# Altium PCB MK1.PcbDoc
Units mm, origin at the board's own origin, x right, y up, seen from the top; angles counter-clockwise.
Board outline 100 x 80 mm, 4 copper layers (Top signal, GND, VCC, Bottom signal), stack 0.603 mm thick; 68 components, 43 nets, 503 pads, 0 vias.
Unrouted connection lines stored in the file: 242.
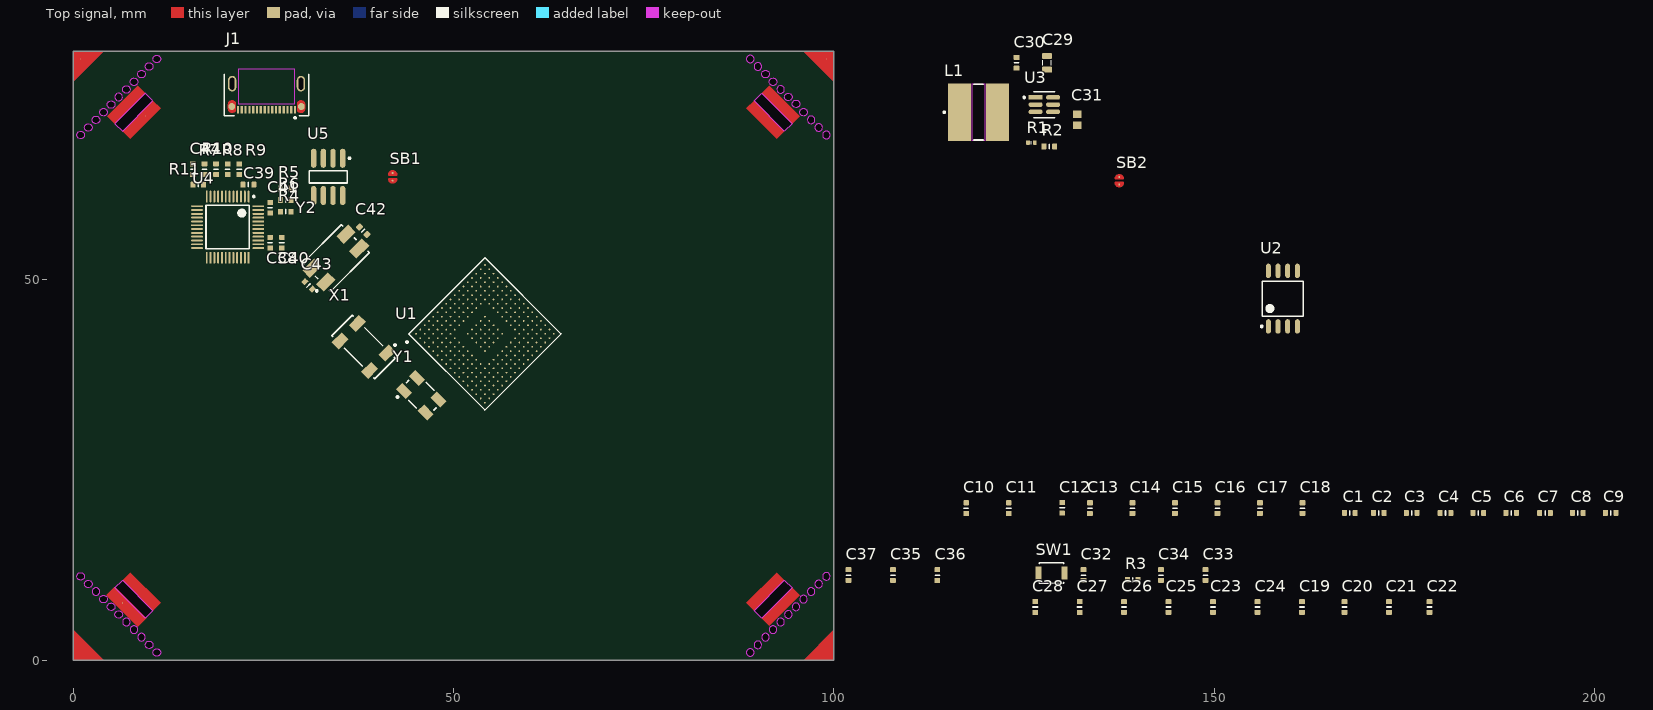
[diagram p0: Top signal view]
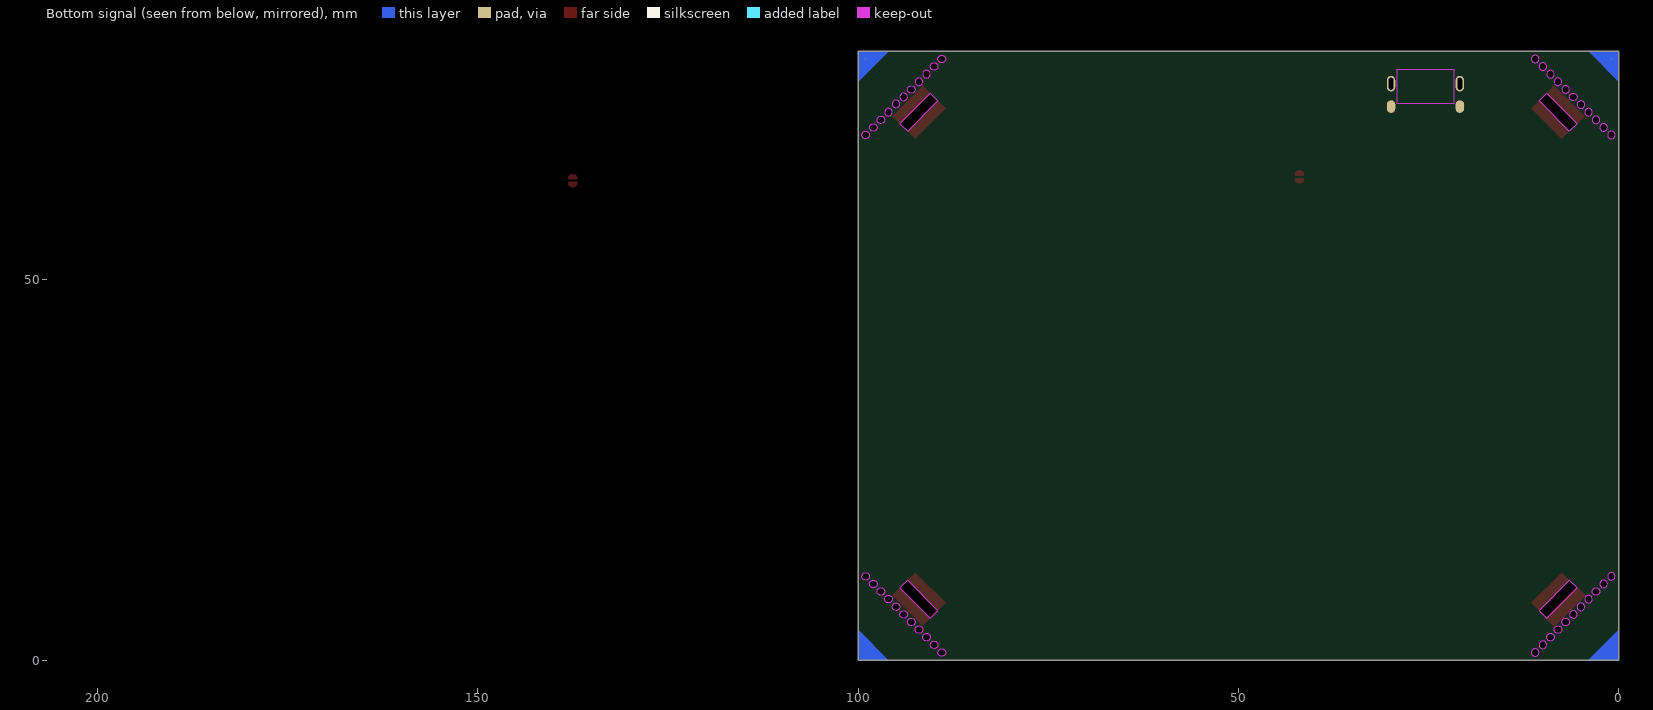
[diagram p1: Bottom signal view, seen from below]
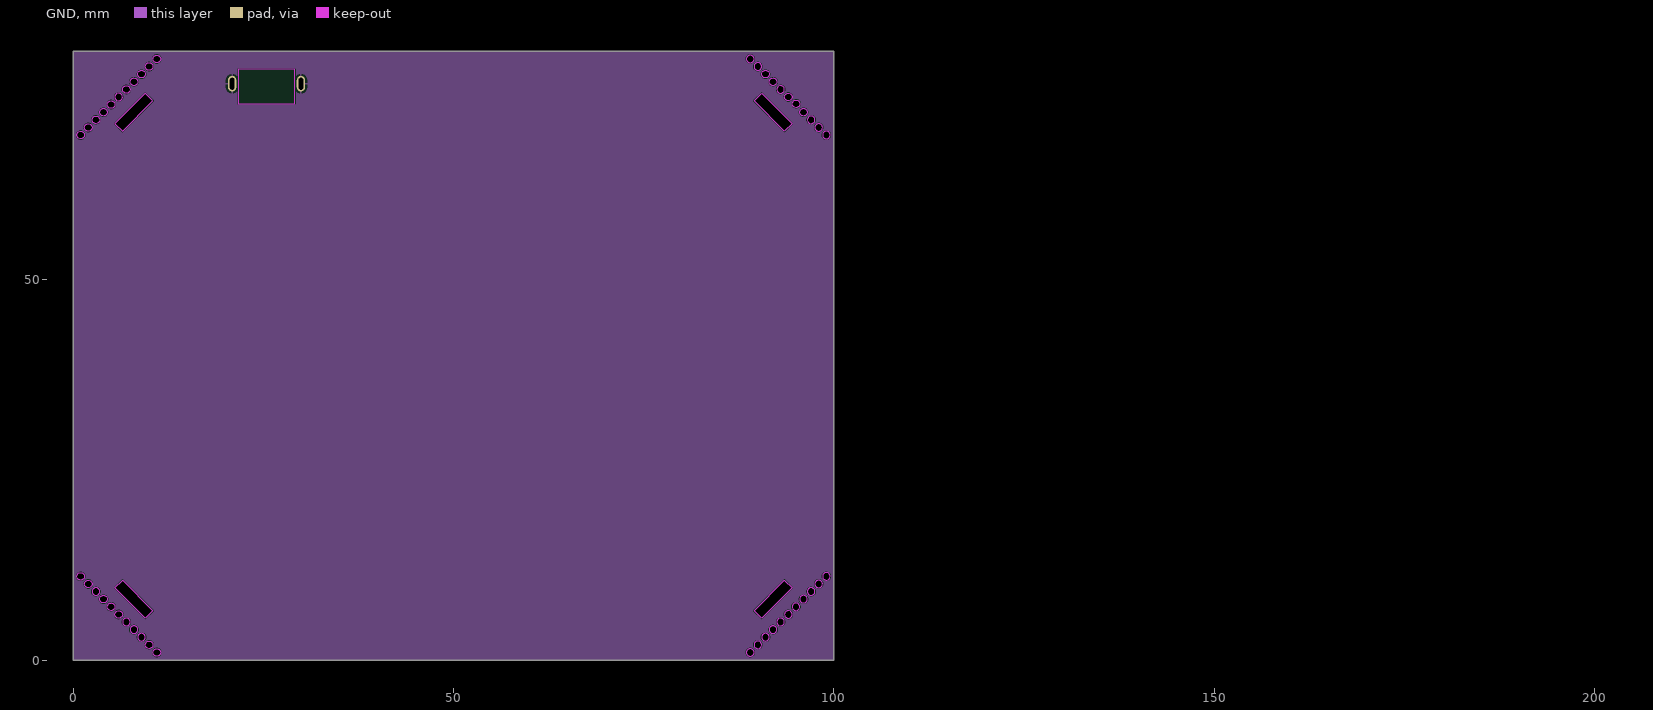
[diagram p2: GND]
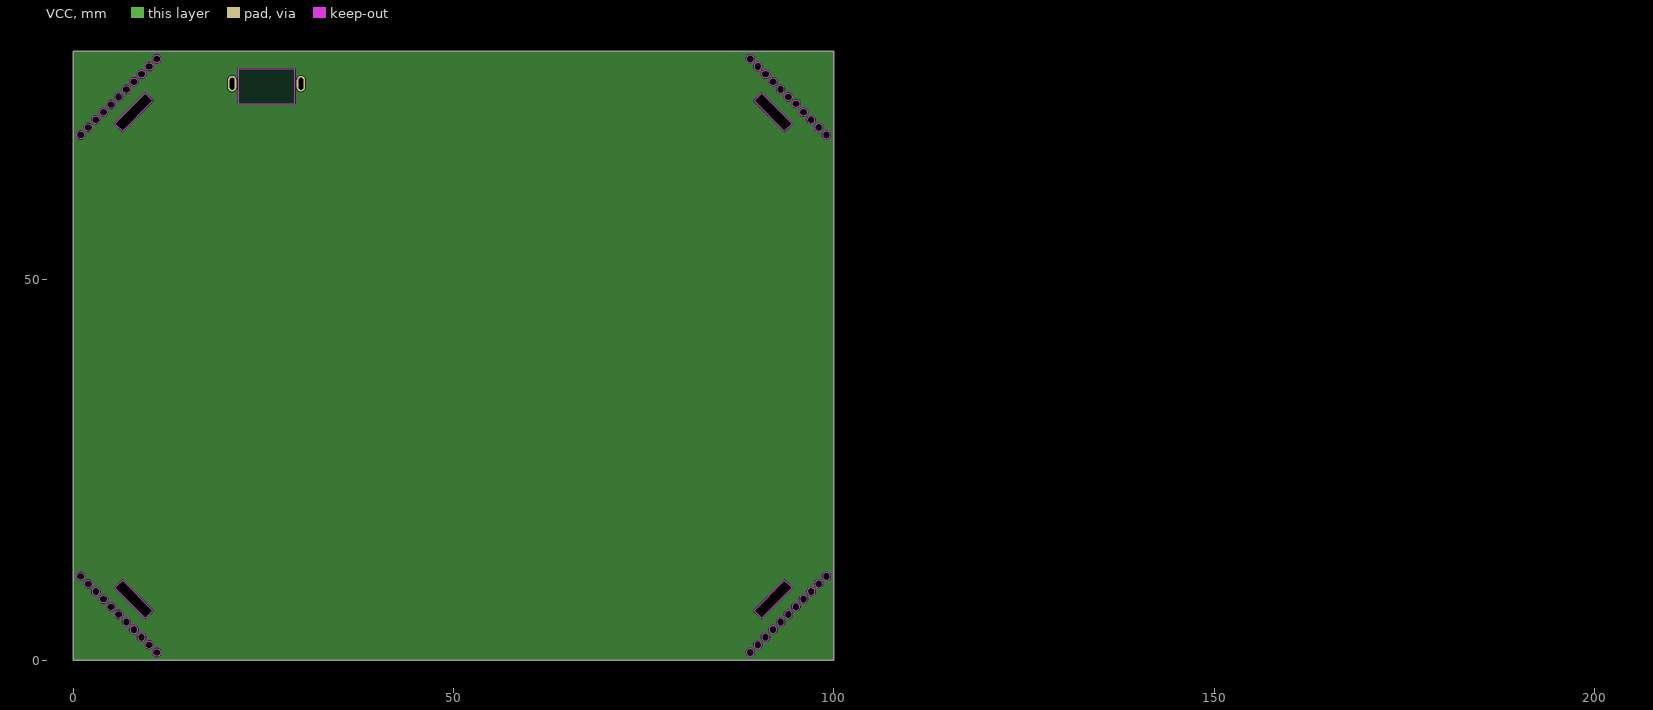
[diagram p3: VCC]

## Layer stack, top to bottom
Top Solder: solder mask 0.0102, Solder Resist, Dk 3.5
Top signal: signal copper 0.0356
Dielectric 2: prepreg 0.0711, PP-006, Dk 4.1
GND: signal copper 0.035
Dielectric 1: dielectric 0.32, FR-4, Dk 4.8
VCC: signal copper 0.035
Dielectric 3: prepreg 0.0711, PP-006, Dk 4.1
Bottom signal: signal copper 0.0356
Bottom Solder: solder mask 0.0102, Solder Resist, Dk 3.5

## Board outline
0,0 0,80 100,80 100,0
cut-out: 95.5,72 cw(c96,72) 96,72.5 cw(c96,72) 96.5,72 cw(c96,72) 96,71.5 cw(c96,72)
cut-out: 96.5,71 ccw(c97,71) 97,70.5 ccw(c97,71) 97.5,71 ccw(c97,71) 97,71.5 ccw(c97,71)
cut-out: 97.5,70 ccw(c98,70) 98,69.5 ccw(c98,70) 98.5,70 ccw(c98,70) 98,70.5 ccw(c98,70)
cut-out: 91.5,76 cw(c92,76) 92,76.5 cw(c92,76) 92.5,76 cw(c92,76) 92,75.5 cw(c92,76)
cut-out: 94.527,73.102 cw(c95.027,73.102) 95.027,73.602 cw(c95.027,73.102) 95.527,73.102 cw(c95.027,73.102) 95.027,72.602 cw(c95.027,73.102)
cut-out: 92.5,75 ccw(c93,75) 93,74.5 ccw(c93,75) 93.5,75 ccw(c93,75) 93,75.5 ccw(c93,75)
cut-out: 93.5,74 cw(c94,74) 94,74.5 cw(c94,74) 94.5,74 cw(c94,74) 94,73.5 cw(c94,74)
cut-out: 99,68.5 ccw(c99,69) 99.5,69 ccw(c99,69) 99,69.5 ccw(c99,69) 98.5,69 ccw(c99,69)
cut-out: 98.5,11 ccw(c99,11) 99,10.5 ccw(c99,11) 99.5,11 ccw(c99,11) 99,11.5 ccw(c99,11)
cut-out: 97.5,10 ccw(c98,10) 98,9.5 ccw(c98,10) 98.5,10 ccw(c98,10) 98,10.5 ccw(c98,10)
cut-out: 96.5,9 ccw(c97,9) 97,8.5 ccw(c97,9) 97.5,9 ccw(c97,9) 97,9.5 ccw(c97,9)
cut-out: 95.5,8 ccw(c96,8) 96,7.5 ccw(c96,8) 96.5,8 ccw(c96,8) 96,8.5 ccw(c96,8)
cut-out: 94.5,7 ccw(c95,7) 95,6.5 ccw(c95,7) 95.5,7 ccw(c95,7) 95,7.5 ccw(c95,7)
cut-out: 93.5,6 ccw(c94,6) 94,5.5 ccw(c94,6) 94.5,6 ccw(c94,6) 94,6.5 ccw(c94,6)
cut-out: 92.5,5 ccw(c93,5) 93,4.5 ccw(c93,5) 93.5,5 ccw(c93,5) 93,5.5 ccw(c93,5)
cut-out: 91.5,4 ccw(c92,4) 92,3.5 ccw(c92,4) 92.5,4 ccw(c92,4) 92,4.5 ccw(c92,4)
cut-out: 88.5,79 ccw(c89,79) 89,78.5 ccw(c89,79) 89.5,79 ccw(c89,79) 89,79.5 ccw(c89,79)
cut-out: 11,78.5 cw(c11,79) 10.5,79 cw(c11,79) 11,79.5 cw(c11,79) 11.5,79 cw(c11,79)
cut-out: 90.5,77 cw(c91,77) 91,77.5 cw(c91,77) 91.5,77 cw(c91,77) 91,76.5 cw(c91,77)
cut-out: 89.5,78 ccw(c90,78) 90,77.5 ccw(c90,78) 90.5,78 ccw(c90,78) 90,78.5 ccw(c90,78)
cut-out: 9.5,78 cw(c10,78) 10,78.5 cw(c10,78) 10.5,78 cw(c10,78) 10,77.5 cw(c10,78)
cut-out: 9,76.5 cw(c9,77) 8.5,77 cw(c9,77) 9,77.5 cw(c9,77) 9.5,77 cw(c9,77)
cut-out: 8,75.5 cw(c8,76) 7.5,76 cw(c8,76) 8,76.5 cw(c8,76) 8.5,76 cw(c8,76)
cut-out: 7,74.5 cw(c7,75) 6.5,75 cw(c7,75) 7,75.5 cw(c7,75) 7.5,75 cw(c7,75)
cut-out: 6,73.5 ccw(c6,74) 6.5,74 ccw(c6,74) 6,74.5 ccw(c6,74) 5.5,74 ccw(c6,74)
cut-out: 90.5,3 ccw(c91,3) 91,2.5 ccw(c91,3) 91.5,3 ccw(c91,3) 91,3.5 ccw(c91,3)
cut-out: 5,72.5 cw(c5,73) 4.5,73 cw(c5,73) 5,73.5 cw(c5,73) 5.5,73 cw(c5,73)
cut-out: 89.5,2 ccw(c90,2) 90,1.5 ccw(c90,2) 90.5,2 ccw(c90,2) 90,2.5 ccw(c90,2)
cut-out: 88.5,1 ccw(c89,1) 89,0.5 ccw(c89,1) 89.5,1 ccw(c89,1) 89,1.5 ccw(c89,1)
cut-out: 4,71.5 cw(c4,72) 3.5,72 cw(c4,72) 4,72.5 cw(c4,72) 4.5,72 cw(c4,72)
cut-out: 3,70.5 cw(c3,71) 2.5,71 cw(c3,71) 3,71.5 cw(c3,71) 3.5,71 cw(c3,71)
cut-out: 2,69.5 cw(c2,70) 1.5,70 cw(c2,70) 2,70.5 cw(c2,70) 2.5,70 cw(c2,70)
cut-out: 1,68.5 cw(c1,69) 0.5,69 cw(c1,69) 1,69.5 cw(c1,69) 1.5,69 cw(c1,69)
cut-out: 7.5,4 ccw(c8,4) 8,3.5 ccw(c8,4) 8.5,4 ccw(c8,4) 8,4.5 ccw(c8,4)
cut-out: 6.5,5 ccw(c7,5) 7,4.5 ccw(c7,5) 7.5,5 ccw(c7,5) 7,5.5 ccw(c7,5)
cut-out: 10.5,1 cw(c11,1) 11,1.5 cw(c11,1) 11.5,1 cw(c11,1) 11,0.5 cw(c11,1)
cut-out: 8.5,3 ccw(c9,3) 9,2.5 ccw(c9,3) 9.5,3 ccw(c9,3) 9,3.5 ccw(c9,3)
cut-out: 9.5,2 cw(c10,2) 10,2.5 cw(c10,2) 10.5,2 cw(c10,2) 10,1.5 cw(c10,2)
cut-out: 2,9.5 cw(c2,10) 1.5,10 cw(c2,10) 2,10.5 cw(c2,10) 2.5,10 cw(c2,10)
cut-out: 1,10.5 cw(c1,11) 0.5,11 cw(c1,11) 1,11.5 cw(c1,11) 1.5,11 cw(c1,11)
cut-out: 6,5.5 cw(c6,6) 5.5,6 cw(c6,6) 6,6.5 cw(c6,6) 6.5,6 cw(c6,6)
cut-out: 5,6.5 cw(c5,7) 4.5,7 cw(c5,7) 5,7.5 cw(c5,7) 5.5,7 cw(c5,7)
cut-out: 3,8.5 ccw(c3,9) 3.5,9 ccw(c3,9) 3,9.5 ccw(c3,9) 2.5,9 ccw(c3,9)
cut-out: 4,7.5 cw(c4,8) 3.5,8 cw(c4,8) 4,8.5 cw(c4,8) 4.5,8 cw(c4,8)
cut-out: 93.5,10.5 94.5,9.5 90.5,5.5 89.5,6.5
cut-out: 89.5,73.5 90.5,74.5 94.5,70.5 93.5,69.5
cut-out: 5.5,70.5 6.5,69.5 10.5,73.5 9.5,74.5
cut-out: 6.5,10.5 10.5,6.5 9.5,5.5 5.5,9.5

## Design rules (kind name [scope] priority, off if disabled: settings)
Clearance [All] p1: gap=0.1 ignorepadtopadclearanceinfootprint=FALSE except(0.15: SMDPad-SMDPad; 0.2: Arc-Via Arc-Hole Track-Via Track-Hole SMDPad-Via THPad-Via Via-Via)
PolygonConnect [All] p1: connectstyle=Relief reliefconductorwidth=0.254 reliefentries=4 polygonreliefangle="90 Angle" airgapwidth=0.254
RoutingVias [All] p1: holewidth=0.508 width=1.27 viastyle="Through Hole" minholewidth=0.15 minwidth=0.25 maxholewidth=0.254 maxwidth=0.8
SolderMaskExpansion [All] p1: expansion=0.102 istentingtop=FALSE
SupplyNets "Schematic Supply Nets_3" [InNet('3V3')] p1: voltage=0.000
SupplyNets "Schematic Supply Nets_1" [InNet('+5')] p2: voltage=0.000
SupplyNets "Schematic Supply Nets" [InNet('GND')] p3: voltage=0.000
Width [All] p1: maxlimit=0.508 minlimit=0.1 preferedwidth=0.254 minimp=50.000000 maximp=50.000000 favimp=50.000000
30 further rules are at their usual default settings.

## Classes and differential pairs
component class "USB interface": J1
component class SMPS: C29 C30 C31 L1 R1 R2 U3
component class MCU: C1 C2 C3 C4 C5 C6 C7 C8 C9 C10 C11 C12 C13 C14 C15 C16 C17 C18 C19 C20 C21 C22 C23 C24 C25 C26 C27 C28 C32 C33 C34 C35 C36 C37 R3 SW1 U1 U2 X1 Y1
component class Main: SB1 SB2
component class FTDI: C38 C39 C40 C41 C42 C43 C44 R4 R5 R6 R7 R8 R9 R10 R11 U4 U5 Y2

## Components (designator, comment, footprint, x,y, rotation, side; value= is the part's Value field where it differs from the comment)
C1 "Capacitor 470nF +/-20% 25V 0603" CAPC0603(1608)100_L 167.801,19.339 r0 top value=100nF
C2 "Capacitor 470nF +/-20% 25V 0603" CAPC0603(1608)100_L 171.611,19.339 r0 top value=100nF
C3 "Capacitor 470nF +/-20% 25V 0603" CAPC0603(1608)100_L 175.929,19.339 r0 top value=100nF
C4 "Capacitor 470nF +/-20% 25V 0603" CAPC0603(1608)100_L 180.374,19.339 r0 top value=100nF
C5 "Capacitor 470nF +/-20% 25V 0603" CAPC0603(1608)100_L 184.692,19.339 r0 top value=100nF
C6 "Capacitor 470nF +/-20% 25V 0603" CAPC0603(1608)100_L 189.01,19.339 r0 top value=100nF
C7 "Capacitor 470nF +/-20% 25V 0603" CAPC0603(1608)100_L 193.455,19.339 r0 top value=100nF
C8 "Capacitor 470nF +/-20% 25V 0603" CAPC0603(1608)100_L 197.773,19.339 r0 top value=100nF
C9 "Capacitor 470nF +/-20% 25V 0603" CAPC0603(1608)100_L 202.091,19.339 r0 top value=100nF
C10 "Capacitor 470nF +/-20% 25V 0603" CAPC0603(1608)100_L 117.382,19.974 r90 top value=100nF
C11 "Capacitor 470nF +/-20% 25V 0603" CAPC0603(1608)100_L 122.97,19.974 r90 top value=100nF
C12 "Capacitor 470nF +/-20% 25V 0603" CAPC0603(1608)100_L 130,20 r90 top value=100nF
C13 "Capacitor 470nF +/-20% 25V 0603" CAPC0603(1608)100_L 133.638,19.974 r90 top value=100nF
C14 "Capacitor 470nF +/-20% 25V 0603" CAPC0603(1608)100_L 139.226,19.974 r90 top value=100nF
C15 "Capacitor 470nF +/-20% 25V 0603" CAPC0603(1608)100_L 144.814,19.974 r90 top value=100nF
C16 "Capacitor 470nF +/-20% 25V 0603" CAPC0603(1608)100_L 150.402,19.974 r90 top value=100nF
C17 "Capacitor 470nF +/-20% 25V 0603" CAPC0603(1608)100_L 155.99,19.974 r90 top value=100nF
C18 "Capacitor 470nF +/-20% 25V 0603" CAPC0603(1608)100_L 161.578,19.974 r90 top value=100nF
C19 "Capacitor 470nF +/-20% 25V 0603" CAPC0603(1608)100_L 161.504,6.974 r90 top value=100nF
C20 "Capacitor 470nF +/-20% 25V 0603" CAPC0603(1608)100_L 167.092,6.974 r90 top value=100nF
C21 "Capacitor 470nF +/-20% 25V 0603" CAPC0603(1608)100_L 172.934,6.974 r90 top value=100nF
C22 "Capacitor 4.7µF +/-20% 10V 0603" CAPC0603(1608)100_L 178.268,6.974 r90 top value=4.7µF
C23 "Capacitor 470nF +/-20% 25V 0603" CAPC0603(1608)100_L 149.82,6.974 r90 top value=100nF
C24 "Capacitor 1µF +/-40% 50V 0603" CAPC0603(1608)100_L 155.662,6.974 r90 top value=1µF
C25 "Capacitor 4.7µF +/-20% 10V 0603" CAPC0603(1608)100_L 143.978,6.974 r90 top value=4.7µF
C26 "Capacitor 470nF +/-20% 25V 0603" CAPC0603(1608)100_L 138.136,6.974 r90 top value=2.2uF
C27 "Capacitor 470nF +/-20% 25V 0603" CAPC0603(1608)100_L 132.294,6.974 r90 top value=2.2uF
C28 "Capacitor 470nF +/-20% 25V 0603" CAPC0603(1608)100_L 126.452,6.974 r90 top value=2.2uF
C29 "Capacitor 4.7µF +/-40% 25V 0805" CAPC0805(2012)145_L 128,78.5 r90 top value=100nF
C30 "Capacitor 4.7µF +/-20% 10V 0603" CAPC0603(1608)100_L 124,78.5 r90 top value=2.2uF
C31 "Capacitor 1uF +/- 10% 16V 0603" CAPC1608X90X35ML15T15 132,71 r90 top value=47uF
C32 "Capacitor 470nF +/-20% 25V 0603" CAPC0603(1608)100_L 132.791,11.176 r90 top value=100nF
C33 "Capacitor 470nF +/-20% 25V 0603" CAPC0603(1608)100_L 148.844,11.176 r90 top value=10pF
C34 "Capacitor 470nF +/-20% 25V 0603" CAPC0603(1608)100_L 142.977,11.176 r90 top value=10pF
C35 "Capacitor 470nF +/-20% 25V 0603" CAPC0603(1608)100_L 107.747,11.176 r90 top value=20pF
C36 "Capacitor 470nF +/-20% 25V 0603" CAPC0603(1608)100_L 113.589,11.176 r90 top value=20pF
C37 "Capacitor 470nF +/-20% 25V 0603" CAPC0603(1608)100_L 101.905,11.176 r90 top value=100nF
C38 "Capacitor 470nF +/-20% 25V 0603" CAPC0603(1608)100_L 25.908,54.864 r270 top value=100nF
C39 "Capacitor 470nF +/-20% 25V 0603" CAPC0603(1608)100_L 23.052,62.484 r0 top value=100nF
C40 "Capacitor 470nF +/-20% 25V 0603" CAPC0603(1608)100_L 27.432,54.864 r270 top value=10uF
C41 "Capacitor 470nF +/-20% 25V 0603" CAPC0603(1608)100_L 25.908,59.436 r270 top value=100nF
C42 "Capacitor 470nF +/-20% 25V 0603" CAPC0603(1608)100_L 38.136,56.424 r135 top value=27pF
C43 "Capacitor 470nF +/-20% 25V 0603" CAPC0603(1608)100_L 30.952,49.24 r315 top value=27pF
C44 "Capacitor 470nF +/-20% 25V 0603" CAPC0603(1608)100_L 15.748,64.5 r90 top value=33nF
J1 "213083-0005" FP-2130830005-MFG 25.425,75.895 r180 top
L1 "10uH" WE-PD2A_7850 119,72 r0 top
R1 "121KR2F" RESC0402(1005)_L 125.95,68 r0 top value=100k
R2 "120R3J" RESC0603(1608)_L 128.3,67.5 r0 top value=22k
R3 "120R3J" RESC0603(1608)_L 139.268,10.541 r0 top value=10k
R4 "120R3J" RESC0603(1608)_L 27.94,58.928 r0 top value=470
R5 "120R3J" RESC0603(1608)_L 27.94,61.976 r0 top value=2k2
R6 "120R3J" RESC0603(1608)_L 27.94,60.452 r180 top value=10k
R7 "120R3J" RESC0603(1608)_L 18.796,64.516 r270 top value=27
R8 "120R3J" RESC0603(1608)_L 20.32,64.516 r270 top value=27
R9 "120R3J" RESC0603(1608)_L 21.844,64.516 r270 top value=1k5
R10 "120R3J" RESC0603(1608)_L 17.272,64.516 r90 top value=4k7
R11 "120R3J" RESC0603(1608)_L 16.448,62.484 r0 top value=10k
SB1 "SolderbridgeOpen" PCBComponent_1 42,63.508 r90 top
SB2 "SolderbridgeOpen" PCBComponent_1 137.5,63 r90 top
SW1 "B3U-1000P" FP-B3U-1000P-MFG 128.6,11.455 r0 top
U1 "STM32H750XBH6" FP-TFBGA2650-A07U-MFG 54.131,42.869 r45 top
U2 "W25Q128FVSIG" WINB-SOIC-8_M 159,47.5 r90 top
U3 "TPS54308DDCT" FP-DDC0006A-IPC_A 127.65,73 r0 top
U4 "FT2232D-REEL" LQFP-48_L 20.32,56.896 r270 top
U5 "93C56B-E/SN" SOIC-SN8_M 33.528,63.5 r270 top
X1 "ABS25-32.768KHZ-6-T" ABRA-ABS25-4_V 38.176,41.148 r135 top
Y1 "48MHz" FP-ABM3B-MFG 45.771,34.798 r315 top
Y2 "ABMM-6.000MHZ-B2-T" FP-ABMM-MFG 34.544,52.832 r45 top

## Footprints (in the part's own frame and the unit in brackets; to place one, negate y for a bottom-side part, rotate by r counter-clockwise, add the part's x,y. Pads: shape width x height; smd on the part's side, far side on the other; paste and mask are expansions set on the pad)
ABRA-ABS25-4_V [mm] "SMD, 4-Leads, Body 8x3.8mm, Pitch 5.5mm, Height 2.5mm"
  rect 1.3x1.9 smd: 1(-2.75,-1.6) 2(2.75,-1.6) 3(2.75,1.6) 4(-2.75,1.6)
  silkscreen extent -4,-3.22 4,1.9, body extent -4,-2 4,2, height 2.66
CAPC0603(1608)100_L [mm] "Chip Capacitor, Body 1.6x0.8mm, Height 1.0mm, IPC High Density"
  rrect25% 0.66x0.76 smd: 1(-0.7,0) 2(0.7,0)
  silkscreen extent 0,-0.3 0,0.3, body extent -0.8,-0.4 0.8,0.4, height 0.95
CAPC0805(2012)145_L [mm] "Chip Capacitor, Body 2.0x1.2mm, Height 1.45mm, IPC High Density"
  rrect25% 0.76x1.3 smd: 1(-0.9,0) 2(0.89,0)
  silkscreen extent -0.3,-0.55 0.3,0.55, body extent -1,-0.6 1,0.6, height 1.45
CAPC1608X90X35ML15T15 [mm] "Chip Capacitor, 2-Leads, Body 1.75x0.95mm, IPC Low Density"
  rect 1x1.1 smd: 1(-0.725,0) 2(0.725,0)
  body extent -0.87,-0.48 0.87,0.48, height 0.9
FP-2130830005-MFG [mm]
  round 0.9 smd paste-1000 mask+0: 1(-4.57,3.15) 2(4.57,3.15)
  rrect100% 1.1x1.65 smd far side paste-1000 mask+0: 1(-4.52,3.15) 2(4.52,3.15)
  rrect100% 1.1x2.05 hole 1.55 slot 0.6 at 0 deg paste-2539.97 mask+0: 3(-4.52,0.15) 4(4.52,0.15)
  rect 0.3x1 smd paste+0 mask+0: A1(-3.75,3.55) A4(-2.75,3.55) A5(-1.75,3.55) A6(-0.75,3.55) A7(0.75,3.55) A8(1.75,3.55) A9(2.75,3.55) A12(3.75,3.55) B1(3.25,3.55) B4(2.25,3.55) B5(1.25,3.55) B6(0.25,3.55) B7(-0.25,3.55) B8(-1.25,3.55) B9(-2.25,3.55) B12(-3.25,3.55)
  Top signal region: 5.07,3.425 5.001,3.691 4.812,3.891 4.549,3.974 4.28,3.919 4.07,3.741 4.07,3.741 4.07,2.559 4.28,2.381 4.549,2.326 4.812,2.409 5.001,2.609 5.07,2.875 5.07,2.875
  Top signal region: -5.07,3.425 -5.001,3.691 -4.812,3.891 -4.549,3.974 -4.28,3.919 -4.07,3.741 -4.07,3.741 -4.07,2.559 -4.28,2.381 -4.549,2.326 -4.812,2.409 -5.001,2.609 -5.07,2.875 -5.07,2.875
  Keep-Out Layer region: -3.7,-1.745 3.7,-1.745 3.7,2.755 -3.7,2.755
  silkscreen extent -5.53,-1.07 5.53,4.75, body extent -5.33,-4.18 5.33,4.18, height 0.25
FP-ABM3B-MFG [mm]
  rect 1.8x1.2 smd paste+0 mask+0: 1(-2,-1.2) 2(2,-1.2) 3(2,1.2) 4(-2,1.2)
  silkscreen extent -2.55,-2.5 2.55,1.65, body extent -3,-1.9 3,1.9, height 0.25
FP-ABMM-MFG [mm]
  rect 2.2x1.4 smd paste+0 mask+0: 1(-3.15,-1.27) 2(-3.15,1.27) 3(3.15,1.27)
  rect 2.4x1.4 smd paste+0 mask+0: 4(3.05,-1.27)
  silkscreen extent -4.95,-2.6 3.6,2.6, body extent -4.35,-2.7 4.35,2.7, height 0.25
FP-B3U-1000P-MFG [mm]
  rect 0.8x1.7 smd paste+0 mask+0: 1(-1.7,0) 2(1.7,0)
  silkscreen extent -1.6,-1.35 1.6,1.35, body extent -2.2,-1.45 2.2,1.45, height 0.25
FP-DDC0006A-IPC_A [mm]
  rect 1.854x0.612 smd paste+0 mask+0: 1(-1.15,0.95)
  rrect100% 1.854x0.612 smd paste+0 mask+0: 2(-1.15,0) 3(-1.15,-0.95) 4(1.15,-0.95) 5(1.15,0) 6(1.15,0.95)
  silkscreen extent -2.77,-1.7 1.4,1.7, body extent -2.58,-1.95 2.58,1.95, height 0.25
FP-TFBGA2650-A07U-MFG [mm]
  round 0.225 smd paste+0 mask+0: A1(-6.4,6.4) A2(-5.6,6.4) A3(-4.8,6.4) A4(-4,6.4) A5(-3.2,6.4) A6(-2.4,6.4) A7(-1.6,6.4) A8(-0.8,6.4) A9(0,6.4) A10(0.8,6.4) A11(1.6,6.4) A12(2.4,6.4) A13(3.2,6.4) A14(4,6.4) A15(4.8,6.4) A16(5.6,6.4) A17(6.4,6.4) B1(-6.4,5.6) B2(-5.6,5.6) B3(-4.8,5.6) B4(-4,5.6) B5(-3.2,5.6) B6(-2.4,5.6) B7(-1.6,5.6) B8(-0.8,5.6) B9(0,5.6) B10(0.8,5.6) B11(1.6,5.6) B12(2.4,5.6) B13(3.2,5.6) B14(4,5.6) B15(4.8,5.6) B16(5.6,5.6) B17(6.4,5.6) C1(-6.4,4.8) C2(-5.6,4.8) C3(-4.8,4.8) C4(-4,4.8) C5(-3.2,4.8) C6(-2.4,4.8) C7(-1.6,4.8) C8(-0.8,4.8) C9(0,4.8) C10(0.8,4.8) C11(1.6,4.8) C12(2.4,4.8) C13(3.2,4.8) C14(4,4.8) C15(4.8,4.8) C16(5.6,4.8) C17(6.4,4.8) D1(-6.4,4) D2(-5.6,4) D3(-4.8,4) D4(-4,4) D5(-3.2,4) D6(-2.4,4) D7(-1.6,4) D8(-0.8,4) D9(0,4) D10(0.8,4) D11(1.6,4) D12(2.4,4) D13(3.2,4) D14(4,4) D15(4.8,4) D16(5.6,4) D17(6.4,4) E1(-6.4,3.2) E2(-5.6,3.2) E3(-4.8,3.2) E4(-4,3.2) E5(-3.2,3.2) E6(-2.4,3.2) E7(-1.6,3.2) E8(-0.8,3.2) E9(0,3.2) E10(0.8,3.2) E11(1.6,3.2) E12(2.4,3.2) E13(3.2,3.2) E14(4,3.2) E15(4.8,3.2) E16(5.6,3.2) E17(6.4,3.2) F1(-6.4,2.4) F2(-5.6,2.4) F3(-4.8,2.4) F4(-4,2.4) F5(-3.2,2.4) F13(3.2,2.4) F14(4,2.4) F15(4.8,2.4) F16(5.6,2.4) F17(6.4,2.4) G1(-6.4,1.6) G2(-5.6,1.6) G3(-4.8,1.6) G4(-4,1.6) G5(-3.2,1.6) G7(-1.6,1.6) G8(-0.8,1.6) G9(0,1.6) G10(0.8,1.6) G11(1.6,1.6) G13(3.2,1.6) G14(4,1.6) G15(4.8,1.6) G16(5.6,1.6) G17(6.4,1.6) H1(-6.4,0.8) H2(-5.6,0.8) H3(-4.8,0.8) H4(-4,0.8) H5(-3.2,0.8) H7(-1.6,0.8) H8(-0.8,0.8) H9(0,0.8) H10(0.8,0.8) H11(1.6,0.8) H13(3.2,0.8) H14(4,0.8) H15(4.8,0.8) H16(5.6,0.8) H17(6.4,0.8) J1(-6.4,0) J2(-5.6,0) J3(-4.8,0) J4(-4,0) J5(-3.2,0) J7(-1.6,0) J8(-0.8,0) J9(0,0) J10(0.8,0) J11(1.6,0) J13(3.2,0) J14(4,0) J15(4.8,0) J16(5.6,0) J17(6.4,0) K1(-6.4,-0.8) K2(-5.6,-0.8) K3(-4.8,-0.8) K4(-4,-0.8) K5(-3.2,-0.8) K7(-1.6,-0.8) K8(-0.8,-0.8) K9(0,-0.8) K10(0.8,-0.8) K11(1.6,-0.8) K13(3.2,-0.8) K14(4,-0.8) K15(4.8,-0.8) K16(5.6,-0.8) K17(6.4,-0.8) L1(-6.4,-1.6) L2(-5.6,-1.6) L3(-4.8,-1.6) L4(-4,-1.6) L5(-3.2,-1.6) L7(-1.6,-1.6) L8(-0.8,-1.6) L9(0,-1.6) L10(0.8,-1.6) L11(1.6,-1.6) L13(3.2,-1.6) L14(4,-1.6) L15(4.8,-1.6) L16(5.6,-1.6) L17(6.4,-1.6) M1(-6.4,-2.4) M2(-5.6,-2.4) M3(-4.8,-2.4) M4(-4,-2.4) M5(-3.2,-2.4) M13(3.2,-2.4) M14(4,-2.4) M15(4.8,-2.4) M16(5.6,-2.4) M17(6.4,-2.4) N1(-6.4,-3.2) N2(-5.6,-3.2) N3(-4.8,-3.2) N4(-4,-3.2) N5(-3.2,-3.2) N6(-2.4,-3.2) N7(-1.6,-3.2) N8(-0.8,-3.2) N9(0,-3.2) N10(0.8,-3.2) N11(1.6,-3.2) N12(2.4,-3.2) N13(3.2,-3.2) N14(4,-3.2) N15(4.8,-3.2) N16(5.6,-3.2) N17(6.4,-3.2) P1(-6.4,-4) P2(-5.6,-4) P3(-4.8,-4) P4(-4,-4) P5(-3.2,-4) P6(-2.4,-4) P7(-1.6,-4) P8(-0.8,-4) P9(0,-4) P10(0.8,-4) P11(1.6,-4) P12(2.4,-4) P13(3.2,-4) P14(4,-4) P15(4.8,-4) P16(5.6,-4) P17(6.4,-4) R1(-6.4,-4.8) R2(-5.6,-4.8) R3(-4.8,-4.8) R4(-4,-4.8) R5(-3.2,-4.8) R6(-2.4,-4.8) R7(-1.6,-4.8) R8(-0.8,-4.8) R9(0,-4.8) R10(0.8,-4.8) R11(1.6,-4.8) R12(2.4,-4.8) R13(3.2,-4.8) R14(4,-4.8) R15(4.8,-4.8) R16(5.6,-4.8) R17(6.4,-4.8) T1(-6.4,-5.6) T2(-5.6,-5.6) T3(-4.8,-5.6) T4(-4,-5.6) T5(-3.2,-5.6) T6(-2.4,-5.6) T7(-1.6,-5.6) T8(-0.8,-5.6) T9(0,-5.6) T10(0.8,-5.6) T11(1.6,-5.6) T12(2.4,-5.6) T13(3.2,-5.6) T14(4,-5.6) T15(4.8,-5.6) T16(5.6,-5.6) T17(6.4,-5.6) U1(-6.4,-6.4) U2(-5.6,-6.4) U3(-4.8,-6.4) U4(-4,-6.4) U5(-3.2,-6.4) U6(-2.4,-6.4) U7(-1.6,-6.4) U8(-0.8,-6.4) U9(0,-6.4) U10(0.8,-6.4) U11(1.6,-6.4) U12(2.4,-6.4) U13(3.2,-6.4) U14(4,-6.4) U15(4.8,-6.4) U16(5.6,-6.4) U17(6.4,-6.4)
  silkscreen extent -8.12,-7.08 7.07,7.08, body extent -7.57,-7.57 7.57,7.57, height 0.25
LQFP-48_L [mm] "Thin QFP, 48-Leads, Body 7x7mm, Pitch 0.5mm, IPC High Density"
  oval 1.55x0.25 smd: 1(-4.025,2.75) 2(-4.025,2.25) 3(-4.025,1.75) 4(-4.025,1.25) 5(-4.025,0.75) 6(-4.025,0.25) 7(-4.025,-0.25) 8(-4.025,-0.75) 9(-4.025,-1.25) 10(-4.025,-1.75) 11(-4.025,-2.25) 12(-4.025,-2.75) 25(4.025,-2.75) 26(4.025,-2.25) 27(4.025,-1.75) 28(4.025,-1.25) 29(4.025,-0.75) 30(4.025,-0.25) 31(4.025,0.25) 32(4.025,0.75) 33(4.025,1.25) 34(4.025,1.75) 35(4.025,2.25) 36(4.025,2.75)
  oval 0.25x1.55 smd: 13(-2.75,-4.025) 14(-2.25,-4.025) 15(-1.75,-4.025) 16(-1.25,-4.025) 17(-0.75,-4.025) 18(-0.25,-4.025) 19(0.25,-4.025) 20(0.75,-4.025) 21(1.25,-4.025) 22(1.75,-4.025) 23(2.25,-4.025) 24(2.75,-4.025) 37(2.75,4.025) 38(2.25,4.025) 39(1.75,4.025) 40(1.25,4.025) 41(0.75,4.025) 42(0.25,4.025) 43(-0.25,4.025) 44(-0.75,4.025) 45(-1.25,4.025) 46(-1.75,4.025) 47(-2.25,4.025) 48(-2.75,4.025)
  silkscreen extent -4.15,-2.85 2.85,3.55, body extent -3.5,-3.5 3.5,3.5, height 1.6
PCBComponent_1 [mil]
  round 10 smd mask+0: 1(20,0) 2(-20,0)
  Top signal pour cut-out: -10,20 -10,-20 -20,-20 -30,-10 -30,5 -25,10 -25,15 -15,15
  Top signal region: 10,20 10,-20 20,-20 30,-10 30,10 20,20
  Top signal region: -10,20 -10,-20 -20,-20 -30,-10 -30,-2.5 -27.5,0 -27.5,10 -22.5,15 -15,15 -12.5,17.5
  Top signal lines w10: -10,20 ccw(c-10,0) -10,-20 -10,20 ; 10,20 cw(c10,0) 10,-20 10,20
RESC0402(1005)_L [mm] "Chip Resistor, Body 1.0x0.5mm, IPC High Density"
  rrect25% 0.5x0.55 smd: 1(-0.45,0) 2(0.45,0)
  silkscreen extent 0,-0.2 0,0.2, body extent -0.5,-0.25 0.5,0.25, height 0.3
RESC0603(1608)_L [mm] "Chip Resistor, Body 1.6x0.8mm, IPC High Density"
  rrect25% 0.66x0.76 smd: 1(-0.7,0) 2(0.7,0)
  silkscreen extent 0,-0.3 0,0.3, body extent -0.8,-0.4 0.8,0.4, height 0.45
SOIC-SN8_M [mm] "SOIC, 8-Leads, Body 4.9x3.9mm, Pitch 1.27mm, IPC Low Density"
  oval 2.5x0.7 smd: 1(-2.45,1.905) 2(-2.45,0.635) 3(-2.45,-0.635) 4(-2.45,-1.905) 5(2.45,-1.905) 6(2.45,-0.635) 7(2.45,0.635) 8(2.45,1.905)
  silkscreen extent -2.57,-2.5 0.8,2.93, body extent -2,-2.5 2,2.5, height 1.75
WE-PD2A_7850 [mm] "SMD Power Inductor, body 7.8x7mm"
  rect 3x7.5 smd: 1(-2.5,0) 2(2.5,0)
  Top signal keep-out region: -0.8,3.75 0.8,3.75 0.8,-3.75 -0.8,-3.75
  silkscreen extent -4.62,-3.65 0.65,3.65, body extent -3.81,-3.5 3.81,3.5, height 4.95
WINB-SOIC-8_M [mm] "SOIC, 8-Leads, Body 5.4x5.4mm, Pitch 1.27mm, IPC Low Density"
  oval 1.9x0.65 smd: 1(-3.65,1.905) 2(-3.65,0.635) 3(-3.65,-0.635) 4(-3.65,-1.905) 5(3.65,-1.905) 6(3.65,-0.635) 7(3.65,0.635) 8(3.65,1.905)
  silkscreen extent -3.77,-2.7 2.3,2.9, body extent -2.7,-2.7 2.7,2.7, height 2.16

## Part data
C1 C2 C3 C4 C5 C6 C7 C8 C9 C10 C11 C12 C13 C14 C15 C16 C17 C18 C19 C20 C21 C23 C26 C27 C28 C32 C33 C34 C35 C36 C37 C38 C39 C40 C41 C42 C43 C44: library part CMP-001-00077-3, "Chip Capacitor, 470nF +/-20%, 25V, 0603, Thickness 1 mm", Case/Package=0603, Max Operating Temperature=85°C, Min Operating Temperature=-55°C, Tolerance=10%, Voltage Rating=25V, Mounting Technology=SMT, Pins=2
C22 C25 C30: library part CMP-001-00076-4, "Chip Capacitor, 4.7µF +/-20%, 10V, 0603, Thickness 1 mm", Case/Package=0603, Max Operating Temperature=85°C, Min Operating Temperature=-55°C, Tolerance=10%, Voltage Rating=10V, Mounting Technology=SMT, Pins=2
C24: library part CMP-001-00078-4, "Chip Capacitor, 1µF +/-40%, 50V, 0603, Thickness 1 mm", Case/Package=0603, Max Operating Temperature=85°C, Min Operating Temperature=-55°C, Tolerance=10%, Voltage Rating=50V, Mounting Technology=SMT, Pins=2
C29: library part CMP-001-00080-4, "Chip Capacitor, 4.7µF +/-40%, 25V, 0805, Thickness 1.45 mm", Case/Package=0805, Max Operating Temperature=85°C, Min Operating Temperature=-55°C, Tolerance=20%, Voltage Rating=25V, Mounting Technology=SMT, Pins=2
C31: library part CMP-001-00004-6, "Chip Capacitor, 1 uF, +/- 10%, 16 V, 0603 (1608 Metric)", Capacitor Type=Ceramic, Case/Package=0603, Max Operating Temperature=125°C, Min Operating Temperature=-55°C, Tolerance=10%, Voltage Rating=16V, Mounting Technology=SM, Pins=2, RoHS Compliant=True
J1: library part CMP-04767-000030-2, "CONN RCP USB2.0 TYP C 24P SMD RA", Current Rating=5A, Max Operating Temperature=85°C, Min Operating Temperature=-40°C, Voltage Rating=30V, Contact Material="Gold, Nickel", Country of Origin=CN, Gender=Receptacle, NexarPartId=114105384, Number of Contacts=16, Schedule B="8536695050, 8536695050", USB Standard="USB 2.0"
L1: library part CMP-03913-56466919-1, "78477510 Inductor, Aec-Q200, 10Uh, Unshld, 2.3A Rohs Compliant: Yes", Ambient Temperature Range High=85°C, Ambient Temperature Range Low=-40°C, Case/Package=Nonstandard, Current Rating=2.3A, DC Resistance (DCR)=40mΩ, Inductance=10µH, Max Operating Temperature=125°C, Ratings=AEC-Q200, Saturation Current=2.95A, Self Resonant Frequency=23MHz, Test Frequency=10kHz, Tolerance=20%, Voltage Rating=80V, Composition=Wirewound, Core Material=Ferrite, Height=5mm, Height - Seated (Max)=5.5118mm, Length=7mm, Min Operating Temperature=-40°C, Mount="Surface Mount", NexarPartId=56466919, Number of Pins=2, RoHS=Compliant, Shielding=Unshielded, Width=7.8mm
R1: library part CMP-009-00070-2, "121K 0.063W 1% 0402 (1005 Metric)  SMD", Case/Package=0402, Power=63mW, Tolerance=1%, Mounting Technology=SMT, Pins=2
R2 R3 R4 R5 R6 R7 R8 R9 R10 R11: library part CMP-009-00069-2, "120R 0.1W 5% 0603 (1608 Metric)  SMD", Case/Package=0603, Power=100mW, Tolerance=5%, Mounting Technology=SMT, Pins=2
SW1: library part CMP-2100-03586-2, "SWITCH TACTILE SPST-NO 0.05A 12V", Contact Current Rating=50mA, Contact Resistance=100mR, Insulation Resistance=100MR, Max Operating Temperature=70°C, Max Voltage Rating (DC)=12V, Min Operating Temperature=-25°C, Operating Force=1.5N, Package Quantity=1, Ratings="Dust Proof", Actuator Length=0.4mm, Actuator Type=Standard, Contact Material=Silver, Current Rating=50mA, Depth=2.5mm, Electrical Life=200000Cycles, Height=1.2mm, Illumination Type=Non-Illuminated, Lead Free="Lead Free", Length=4mm, Max Current Rating=50mA, Mechanical Life=200000Cycles, Mount="Surface Mount", Orientation=Straight, Packaging="Tape and Reel", Switch Function=Off-Mom, Switch Travel=0.15mm, Termination=SMD/SMT, Throw Configuration=SPST, Voltage Rating (DC)=12V, Weight=0.000776oz, Width=3mm
U1: library part CMP-12105-000062-1, "IC MCU 32BIT 128KB FLASH TFBGA", Ambient Temperature Range High=+85°C, Ambient Temperature Range Low=-40°C, Frequency=400MHz, Manufacturer=STMicroelectronics, Max Junction Temp=+125°C, Max Supply Voltage=3.6V, Min Supply Voltage=1.62V, Nominal Supply Current=24-348mA, Package=TFBGA2650-A07U, Temperature="-40°C to +125°C", Automotive=No, Category=IC, ComponentLink2Description=Datasheet, ComponentLink2URL=https://www.st.com/resource/en/datasheet/stm32h750xb.pdf, Core Architecture="ARM Cortex-M7", Data Bus Width=32bits, Device Class L1="Integrated Circuits (ICs)", Device Class L2="Embedded Processors and Controllers", Device Class L3=Microcontrollers, Digikey Description="IC MCU 32BIT 128KB FLASH TFBGA", Height=1.1mm, Interface=I2C,SPI,UART,USART,CAN,USB,LIN,IrDA,Ethernet,I2S, Ipc Land Pattern Name=BGA289N80P17X17_1400X1400X110, Lead Free=Yes, Manufacturer Part Number=STM32H750XBH6, Memory Size=128KBytes, Memory Type=FLASH, Number Of A/D Converters=3, Number Of Adc Channels=36, Number Of Cores=1, Number Of Ethernet Channels=1, Number Of I2C Channels=4, Number Of I/Os=168, Number Of Pwm Channels=2, Number Of Spi Channels=6, Number Of Timers/Counters=10, Number Of Uart Channels=9, Number Of Usb Channels=1, Octopart=https://octopart.com/stm32h750xbh6-stmicroelectronics-93259822, Ram Size=1MBytes, RoHS=TRUE, Standoff Height=0.15mm, Temperature Range High=+125°C, Temperature Range Low=-40°C
U2: library part CMP-2000-05005-1, "3V 128M-Bit Serial Flash Memory with Dual/Quad SPI & QPI, 2.7 to 3.6 V, -40 to 85 degC, 8-Pin SOIC, RoHS, Tape and Reel", Manufacturer=Winbond, Operating Supply Voltage (Max)=3.6V, Operating Supply Voltage (Min)=2.7V, Operating Supply Voltage (Typ)=3/3.3V, Operating Temp Range=-40Cto85C, Operating Temperature (Max)=85C, Operating Temperature (Min)=-40C, Operating Temperature Classification=Industrial, Package Description="8-Pin Small Outline Integrated Circuit, Body 5.28 x 5.28 mm, Pitch 1.27 mm", Package Reference=SS-8, Package Type=SOICW, Program/Erase Volt (Typ)=2.7to3.6V, Supply Current=20mA, Access Time (Max)=7ns, Address Bus=24b, Boot Type=NotRequired, Cell Type=NOR, Datasheet URL=http://download.siliconexpert.com/pdfs/2015/11/30/6/42/17/890/win_/manual/3w25q128fv20rev.l2008242015.pdf, Datasheet Version="Rev. L, 08/2015", Density=134217728Bit, Interface Type=Serial(SPI), Manufacturer URL=http://www.winbond.com/hq/index.html?__locale=en, Mounting=SurfaceMount, Number of Words=16777216, Pin Count=8, Programmable=Yes, Rad Hardened=No, Sync/Async=Synchronous, Word Size=8b
U3: library part CMP-04918-000241-1, "IC REG BUCK ADJ 3A TSOT23-6", Case/Package=SOT-23-6, Max Input Voltage=28V, Max Operating Temperature=125°C, Max Output Voltage=26V, Min Input Voltage=4.5V, Min Operating Temperature=-40°C, Min Output Voltage=1V, Output Current=3A, Switching Frequency=350kHz, Mount="Surface Mount", Number of Outputs=1, Output Configuration=Positive, Output Type=Adjustable, Packaging="Tape and Reel", RoHS Compliant=Yes, Synchronous Rectifier=Yes
U4: library part CMP-0579-00002-1, "FT2232D Dual USB to Serial UART/FIFO IC, -40 to +85 degC, 48-Pin LQFP, Pb-Free, Tape and Reel", Manufacturer=FTDI, ComponentLink1Description="Manufacturer URL", ComponentLink1URL=http://www.ftdichip.com/, ComponentLink2Description=Datasheet, ComponentLink2URL=http://www.ftdichip.com/Support/Documents/DataSheets/ICs/DS_FT2232D.pdf, DatasheetVersion="ver 2.05, Apr-2011", PackageDescription="48-Pin Thin Quad Flat Pack, 7 x 7 mm Body, 0.5 mm Pitch", PackageReference=LQFP-48, PackageVersion=Apr-11, PartNumber=FT2232D-REEL
U5: library part CMP-0162-00233-1, "2K, 128x16-bit, 5.0V Microwire Serial EEPROM, 8-Pin SOIC 150mil, Extended Temperature", Code_IPC=SOIC127P600-8, Code_JEDEC=MS-012, DatasheetVersion="revF, May-2008", PackageDescription="8-Lead Plastic Small Outline (SN) - Narrow, 3.90mm Body [SOIC]", PackageReference=SOIC-SN8, PackageVersion="revBB, Aug-2009"
X1: library part CMP-2000-05036-1, "Low Frequency Crystal, 32.768 KHz, 6 pF, +/- 20 ppm, -40 to 85 degC, 4-Pin SMD, RoHS, Tape and Reel", Case Height=2.5mm, Case Length=8mm, Case Width=3.8mm, Frequency=32.768kHz, Load Capacitance=6pF, Manufacturer=Abracon, Operating Temperature Range=-40Cto+85C, Package / Case=8mmx3.8mm, Package Description="4-Pin Surface Mount Device, Body 8 x 3.8 mm, Pitch 5.5 mm", Package Reference=ABS25, Tolerance=20PPM, Brand=ABRACON, Datasheet URL=https://datasheet.ciiva.com/854/abs25-854528.pdf, Datasheet Version=Jun-17, Dimensions=3.8mmWx8mmLx2.5mmH, ESR=50kOhms, Factory Pack Quantity=3000, Manufacturer URL=http://www.abracon.com/, Mounting Style=SMD/SMT, Packaging=Reel, Product Category=Crystals, RoHS=Details, Series=ABS25, Termination Style=SMD/SMT, Type=LowFrequencyCrystal
Y1: library part CMP-27762-010589-1, "Crystal 48MHz ±20ppm 18pF SMD-4 5mm x 3.2mm", Case/Package=SMD/SMT, ESR (Equivalent Series Resistance)=50R, Frequency Stability=50ppm, Frequency Tolerance=20ppm, Load Capacitance=18pF, Max Operating Temperature=70°C, Min Operating Temperature=-20°C, Operating Frequency="48 MHz", Package Quantity=1000, Resistor Type=Ceramic, Depth=3.2mm, Frequency=48MHz, Height=0.043inch, Lead Free="Lead Free", Length=5mm, Mount="Surface Mount", Number of Pins=4, Packaging="Tape and Reel", REACH SVHC="No SVHC", Series=ABM3B, Series Resistance=50R, Termination=SMD/SMT, Tolerance=20ppm, Width=3.2mm
Y2: library part CMP-27762-012698-1, "CRYSTAL 6.0000MHZ 18PF SMD", Case/Package=SMD/SMT, ESR (Equivalent Series Resistance)=70R, Frequency=6MHz, Frequency Stability=50ppm, Frequency Tolerance=20ppm, Load Capacitance=18pF, Max Operating Temperature=70°C, Min Operating Temperature=-20°C, Operating Frequency="6 MHz", Package Quantity=1000, Resistor Type=Ceramic, Height=0.051inch, Lead Free="Lead Free", Length=0.276inch, Mount="Surface Mount", Number of Pins=4, Packaging="Tape and Reel", Series=ABMM, Series Resistance=70R, Termination=SMD/SMT, Tolerance=20ppm, Width=5mm

## Free pads (board coordinates)
  round 0.025 smd mask+0: 4(1,1) 4(1.002,79) 4(99,1) 4(99,79)
  round 0.025 smd far side mask+0: 4(1,1.002) 4(1,79) 4(99,1) 4(99,79)
  round 0.025 smd: 5(6.5,7.5) 5(7.5,73.5) 5(8.5,9.5) 5(9.5,71.5) 5(90.5,8.5) 5(91.5,70.5) 5(92.5,6.5) 5(93.5,72.5)

## Nets (pads, with @x,y where several pads share a name; then routed paths per layer and width w, separated by ;. In a path a pad name is that pad's centre, name@x,y a point inside that pad or via, vN(x,y) a via of type N, cw(c..) or ccw(c..) an arc to the next point about the centre after c; other vN are vias at no path point)
3V3: C1.2 C2.2 C3.2 C4.2 C5.2 C6.2 C7.2 C8.2 C9.2 C10.2 C11.2 C12.2 C13.2 C14.2 C15.2 C16.2 C17.2 C18.2 C19.2 C20.2 C21.2 C22.2 C31.2 C37.2 L1.2 R1.2 U1.E6 U1.E7 U1.E9 U1.E11 U1.F5 U1.F17 U1.G5 U1.G13 U1.G17 U1.H5 U1.H13 U1.J13 U1.K5 U1.K13 U1.L5 U1.L13 U1.M1 U1.M5 U1.M13 U1.N7 U1.N8 U1.N10 U1.N11 U1.N12 U1.P17 U2.8 U4.14 U4.31
+5: C30.2 C38.1 C39.1 C40.1 J1.A4 J1.A9 J1.B4 J1.B9 R4.2 R6.1 R10.2 U3.3 U4.3 U4.42 U5.8
D+: J1.A6 J1.B6 R8.1
D-: J1.A7 J1.B7 R7.1
DM: R7.2 U4.8
DP: R8.2 R9.1 U4.7
GND: C1.1 C2.1 C3.1 C4.1 C5.1 C6.1 C7.1 C8.1 C9.1 C10.1 C11.1 C12.1 C13.1 C14.1 C15.1 C16.1 C17.1 C18.1 C19.1 C20.1 C21.1 C22.1 C23.1 C24.1 C25.1 C26.2 C27.1 C28.1 C30.1 C31.1 C32.1 C33.1 C34.1 C35.1 C36.1 C37.1 C38.2 C39.2 C40.2 C41.1 C42.1 C43.1 C44.1 J1.1 J1.2 J1.3 J1.4 J1.A1 J1.A12 J1.B1 J1.B12 R2.1 R3.1 R11.1 SW1.1 U1.A1 U1.A17 U1.B2 U1.B6 U1.C10 U1.C13 U1.C16 U1.G7 U1.G8 U1.G9 U1.G10 U1.G11 U1.G16 U1.H7 U1.H8 U1.H9 U1.H10 U1.H11 U1.J3 U1.J7 U1.J8 U1.J9 U1.J10 U1.J11 U1.J16 U1.J17 U1.K7 U1.K8 U1.K9 U1.K10 U1.K11 U1.K15 U1.L7 U1.L8 U1.L9 U1.L10 U1.L11 U1.L15 U1.M15 U1.N1 U1.N16 U1.P1 U1.R4 U1.R8 U1.T12 U1.U1 U1.U17 U2.4 U3.1 U4.9 U4.18 U4.25 U4.34 U4.45 U4.47 U5.5 Y1.2 Y1.4 Y2.2 Y2.4
JTCK/SWCLK: U1.B14 U4.24
JTDI: U1.A14 U4.23
JTDO: U1.C6 U4.22
JTMS/SWDIO: U1.C15 U4.21
NetC23_2: C23.2 C24.2 U1.L1
NetC25_2: C25.2 U1.A6 U1.C17 U1.U12
NetC26_1: C26.1 U1.A7
NetC27_2: C27.2 U1.D17
NetC28_2: C28.2 U1.U11
NetC29_1: C29.1 L1.1 U3.2
NetC29_2: C29.2 U3.6
NetC32_2: C32.2 SW1.2 U1.K1
NetC33_2: C33.2 U1.C2 X1.1
NetC34_2: C34.2 U1.C1 X1.4
NetC35_2: C35.2 U1.J1 Y1.1
NetC36_2: C36.2 U1.J2 Y1.3
NetC41_2: C41.2 R4.1 U4.46
NetC44_2: C44.2 U4.6
NetR1_1: R1.1 R2.2 U3.4
NetR3_2: R3.2 U1.E8
NetR5_1: R5.1 R6.2 U5.4
NetR5_2: R5.2 U4.2 U5.3
NetR9_2: R9.2 U4.5
NetR10_1: R10.1 R11.2 U4.4
NetSB1_1: SB1.1 U1.D14
NetSB2_1: SB2.1 U1.E17
NetU4_1: U4.1 U5.2
NetU4_48: U4.48 U5.1
QSPI_BK1_IO0: U1.E14 U2.5
QSPI_BK1_IO1: U1.A13 U2.2
QSPI_BK1_IO2: U1.C3 U2.3
QSPI_BK1_IO3: U1.K2 U2.7
QSPI_BK1_NCS: U1.B5 U2.1
QSPI_CLK: U1.L3 U2.6
XTIN: C43.2 U4.43 Y2.1
XTOUT: C42.2 U4.44 Y2.3
pads on no net: J1.A5 J1.A8 J1.B5 J1.B8 SB1.2 SB2.2 U1.A2 U1.A3 U1.A4 U1.A5 U1.A8 U1.A9 U1.A10 U1.A11 U1.A12 U1.A15 U1.A16 U1.B1 U1.B3 U1.B4 U1.B7 U1.B8 U1.B9 U1.B10 U1.B11 U1.B12 U1.B13 U1.B15 U1.B16 U1.B17 U1.C4 U1.C5 U1.C7 U1.C8 U1.C9 U1.C11 U1.C12 U1.C14 U1.D1 U1.D2 U1.D3 U1.D4 U1.D5 U1.D6 U1.D7 U1.D8 U1.D9 U1.D10 U1.D11 U1.D12 U1.D13 U1.D15 U1.D16 U1.E1 U1.E2 U1.E3 U1.E4 U1.E5 U1.E10 U1.E12 U1.E13 U1.E15 U1.E16 U1.F1 U1.F2 U1.F3 U1.F4 U1.F13 U1.F14 U1.F15 U1.F16 U1.G1 U1.G2 U1.G3 U1.G4 U1.G14 U1.G15 U1.H1 U1.H2 U1.H3 U1.H4 U1.H14 U1.H15 U1.H16 U1.H17 U1.J4 U1.J5 U1.J14 U1.J15 U1.K3 U1.K4 U1.K14 U1.K16 U1.K17 U1.L2 U1.L4 U1.L14 U1.L16 U1.L17 U1.M2 U1.M3 U1.M4 U1.M14 U1.M16 U1.M17 U1.N2 U1.N3 U1.N4 U1.N5 U1.N6 U1.N9 U1.N13 U1.N14 U1.N15 U1.N17 U1.P2 U1.P3 U1.P4 U1.P5 U1.P6 U1.P7 U1.P8 U1.P9 U1.P10 U1.P11 U1.P12 U1.P13 U1.P14 U1.P15 U1.P16 U1.R1 U1.R2 U1.R3 U1.R5 U1.R6 U1.R7 U1.R9 U1.R10 U1.R11 U1.R12 U1.R13 U1.R14 U1.R15 U1.R16 U1.R17 U1.T1 U1.T2 U1.T3 U1.T4 U1.T5 U1.T6 U1.T7 U1.T8 U1.T9 U1.T10 U1.T11 U1.T13 U1.T14 U1.T15 U1.T16 U1.T17 U1.U2 U1.U3 U1.U4 U1.U5 U1.U6 U1.U7 U1.U8 U1.U9 U1.U10 U1.U13 U1.U14 U1.U15 U1.U16 U3.5 U4.10 U4.11 U4.12 U4.13 U4.15 U4.16 U4.17 U4.19 U4.20 U4.26 U4.27 U4.28 U4.29 U4.30 U4.32 U4.33 U4.35 U4.36 U4.37 U4.38 U4.39 U4.40 U4.41 U5.6 U5.7 X1.2 X1.3
copper on no net: | length 14.1
  Top signal w0.254: 4.5,8.5 8.5,4.5 9.5,5.5 5.5,9.5 4.5,8.5

## Polygon pours and split planes (outlines as drawn)
GND on GND "GND_L02_P000" (solid, pour order 0): 0,0 0,80 100,80 100,0
3V3 on VCC "3V3_L03_P001" (solid, pour order 1): 0,80 0,0 100,0 100,80

## Other copper
Top signal:
  region: 4.5,71.5 8.5,75.5 9.5,74.5 5.5,70.5
  region: 6.5,69.5 10.5,73.5 11.5,72.5 7.5,68.5
  region: 91.5,75.5 95.5,71.5 94.5,70.5 90.5,74.5
  region: 89.5,73.5 93.5,69.5 92.5,68.5 88.5,72.5
  region: 93.5,10.5 89.5,6.5 88.5,7.5 92.5,11.5
  region: 95.5,8.5 91.5,4.5 90.5,5.5 94.5,9.5
  region: 10.5,6.5 6.5,10.5 7.5,11.5 11.5,7.5
  region: 8.5,4.5 4.5,8.5 5.5,9.5 9.5,5.5
  region: 0.004,79.998 4,79.998 0,75.998 0.002,75.998
  region: 99.998,79.998 99.998,76.002 95.998,80.002 95.998,80
  region: 99.998,0.002 96.002,0.002 100.002,4.002 100,4.002
  region: 0.002,0.002 0.002,3.998 4.002,-0.002 4.002,0
Bottom signal:
  region: 0.002,79.998 3.998,79.998 -0.002,75.998 0,75.998
  region: 99.998,79.998 99.998,76.002 95.998,80.002 95.998,80
  region: 99.998,0.002 96.002,0.002 100.002,4.002 100,4.002
  region: 0.002,0.004 0.002,4 4.002,0 4.002,0.002

## Silkscreen, mask and mechanical layers (free items; w line width, h text height)
Mechanical 1:
  circle w0.1: c89,1 r0.5
  circle w0.1: c90,2 r0.5
  circle w0.1: c91,3 r0.5
  circle w0.1: c92,4 r0.5
  circle w0.1: c93,5 r0.5
  circle w0.1: c94,6 r0.5
  circle w0.1: c95,7 r0.5
  circle w0.1: c96,8 r0.5
  circle w0.1: c97,9 r0.5
  circle w0.1: c98,10 r0.5
  circle w0.1: c99,11 r0.5
  circle w0.1: c99,69 r0.5
  circle w0.1: c98,70 r0.5
  circle w0.1: c97,71 r0.5
  circle w0.1: c96,72 r0.5
  circle w0.1: c95.027,73.102 r0.5
  circle w0.1: c94,74 r0.5
  circle w0.1: c93,75 r0.5
  circle w0.1: c92,76 r0.5
  circle w0.1: c91,77 r0.5
  circle w0.1: c90,78 r0.5
  circle w0.1: c89,79 r0.5
  circle w0.1: c11,79 r0.5
  circle w0.1: c10,78 r0.5
  circle w0.1: c9,77 r0.5
  circle w0.1: c8,76 r0.5
  circle w0.1: c7,75 r0.5
  circle w0.1: c6,74 r0.5
  circle w0.1: c5,73 r0.5
  circle w0.1: c4,72 r0.5
  circle w0.1: c3,71 r0.5
  circle w0.1: c2,70 r0.5
  circle w0.1: c1,69 r0.5
  circle w0.1: c11,1 r0.5
  circle w0.1: c10,2 r0.5
  circle w0.1: c9,3 r0.5
  circle w0.1: c8,4 r0.5
  circle w0.1: c7,5 r0.5
  circle w0.1: c6,6 r0.5
  circle w0.1: c5,7 r0.5
  circle w0.1: c4,8 r0.5
  circle w0.1: c3,9 r0.5
  circle w0.1: c2,10 r0.5
  circle w0.1: c1,11 r0.5
  lines w0.254: 0,0 100,0 100,80 0,80 0,0 ; 0,12 0,12 ; 12,80 12,80 ; 88,80 88,80 ; 100,12 100,12